# EAGLE board PANS (EAGLE 7.6.0)
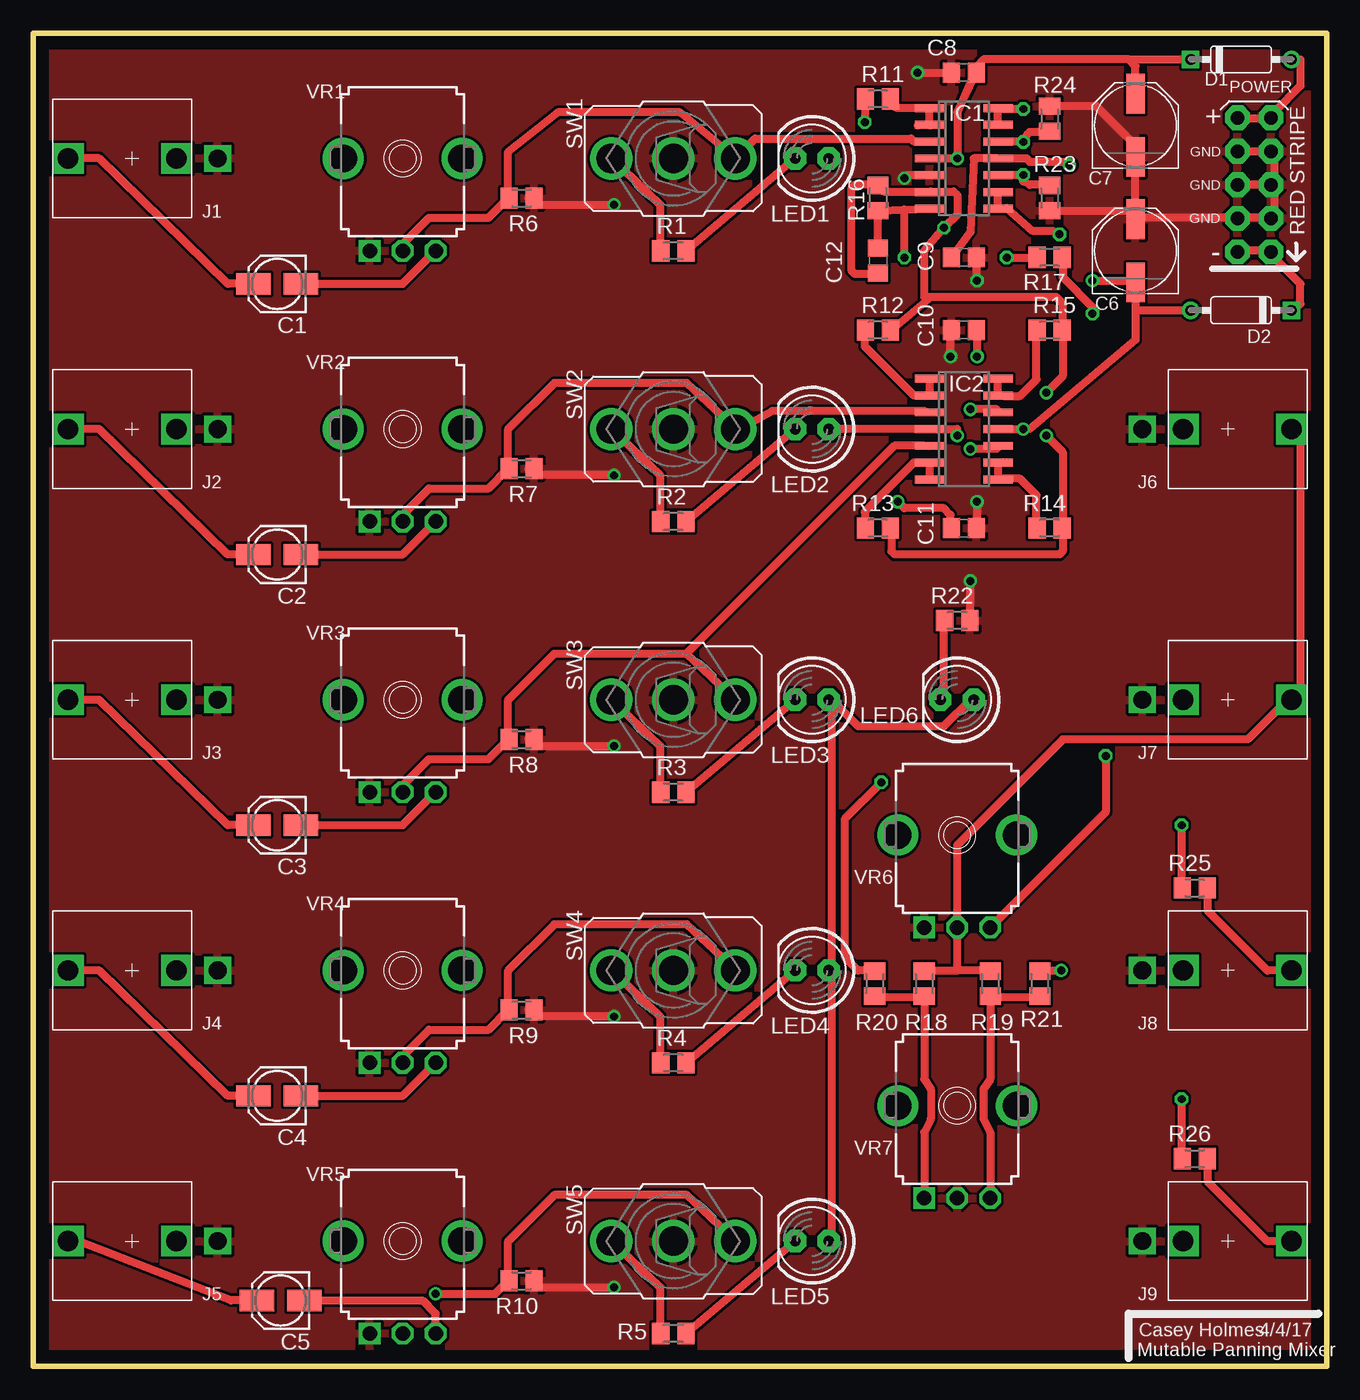
[diagram p0: board, top side]
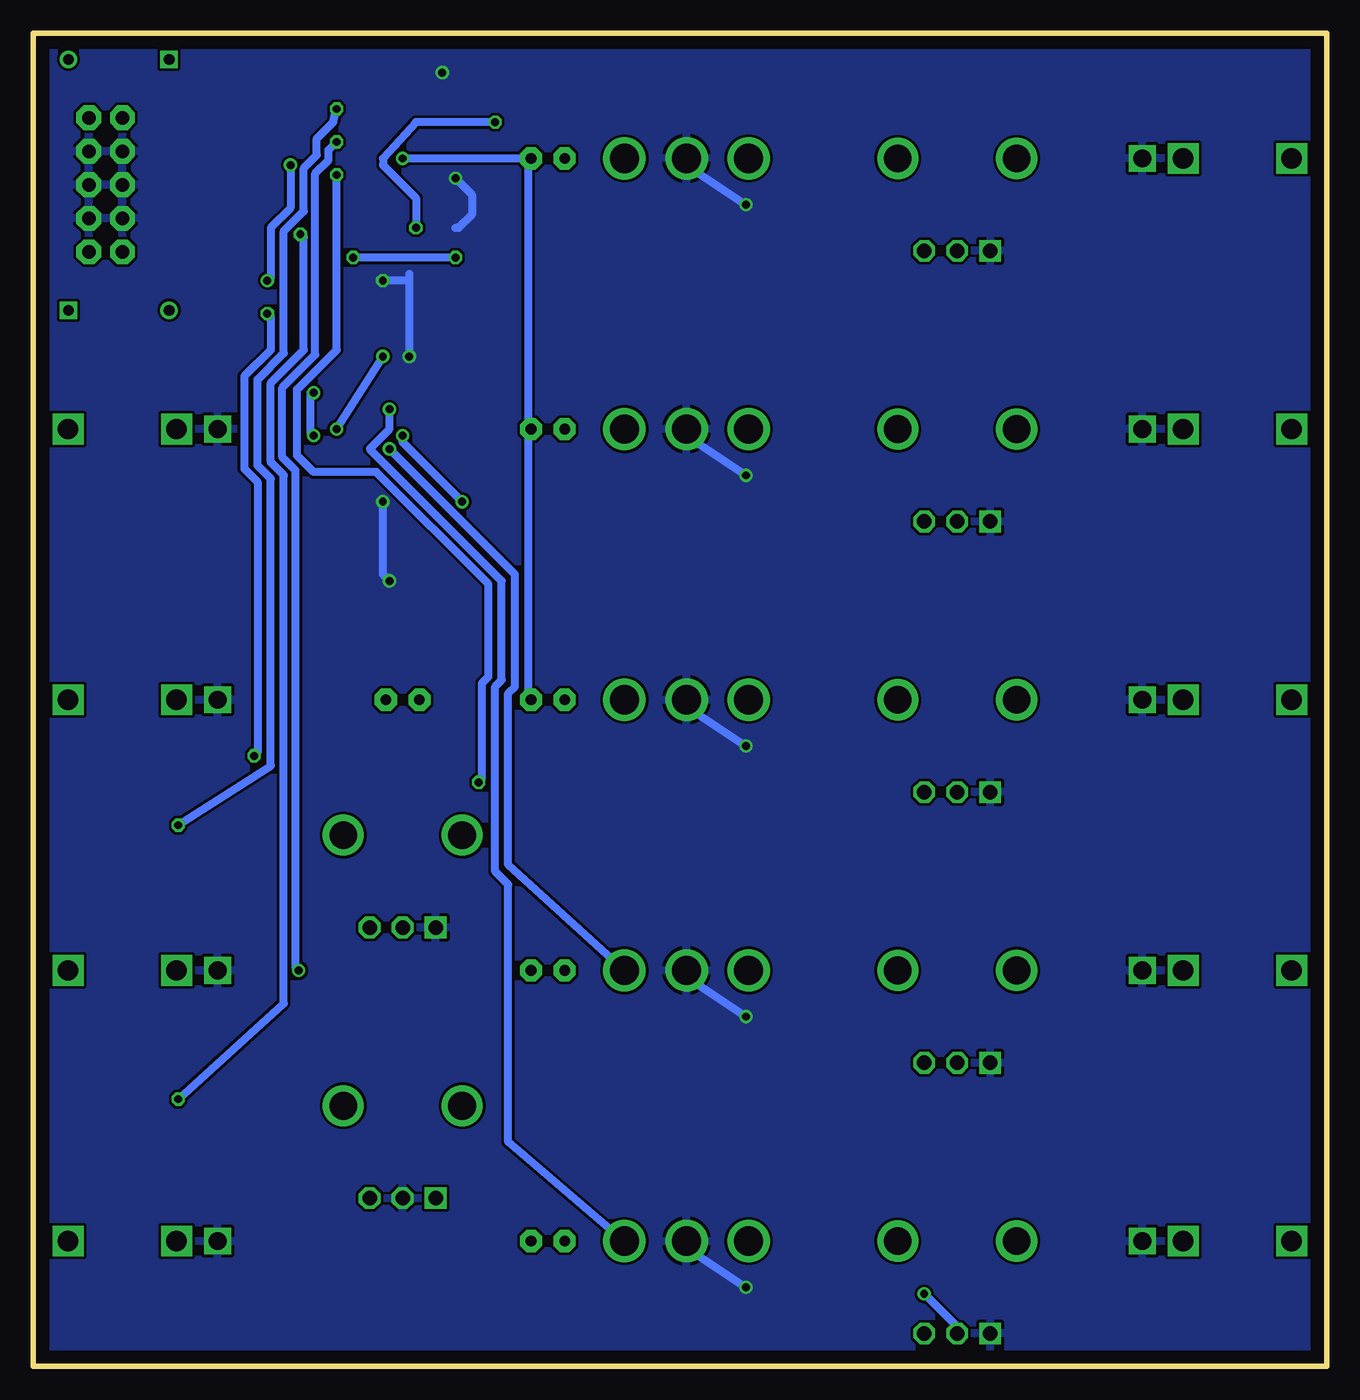
[diagram p1: board, bottom side, seen from below]

Size 98 x 101 mm. Coordinates in mm from the lower left corner, seen from the top.
Outline: 0,0 0,101 98,101 98,0 0,0
Copper layers (1*16): Top 0.035mm / dielectric 1.5mm / Bottom 0.035mm
Design rules "default": minimum track width 10mil, minimum drill 24mil, track to track 8mil, track to pad 8mil, pad to pad 8mil, via to via 8mil, smd to smd 8mil, copper to edge 40mil, drill to drill 8mil, minimum pad ring 10mil, minimum via ring 8mil, stop-mask expansion 4mil, vias tented up to drill 0mil, thermal gap 10mil

## Footprints (pad centres in the part's own frame; a part is rotated, then mirrored left to right if it is on the bottom)
153CLV-0405 = smd 2.6 x 1.6: + 1.8,0; - -1.8,0
PANASONIC_D = smd 3 x 1.4: + 2.4,0; - -2.4,0
C0805 = smd 1.3 x 1.5: 1 -0.95,0; 2 0.95,0
DO35-7 = drill 0.813: A 3.81,0 | drill 0.813 square: C -3.81,0
SO14 = smd 0.6 x 2.2: 1 -3.81,-2.6; 2 -2.54,-2.6; 3 -1.27,-2.6; 4 0,-2.6; 5 1.27,-2.6; 6 2.54,-2.6; 7 3.81,-2.6; 8 3.81,2.6; 9 2.54,2.6; 10 1.27,2.6; 11 0,2.6; 12 -1.27,2.6; 13 -2.54,2.6; 14 -3.81,2.6
THONKICONN = drill 1.35 square: P$1_SLEEVE 0,-6.48 | drill 1.55 square: P$2_SWITCH 0,-3.38; P$3_TIP 0,4.84
LED5MM = drill 0.813 pad 1.676 octagon: A -1.27,0; K 1.27,0
M0805 = smd 1.3 x 1.6: 1 -0.95,0; 2 0.95,0
EURO_PWR_HEADER_FAT = drill 1.016 pad 1.88 octagon: 1 -5.08,-1.27; 2 -5.08,1.27; 3 -2.54,-1.27; 4 -2.54,1.27; 5 0,-1.27; 6 0,1.27; 7 2.54,-1.27; 8 2.54,1.27; 9 5.08,-1.27; 10 5.08,1.27
M9040P = drill 2.2: 1 0,4.699 | drill 2.2 pad 3: 2 0,0; 3 0,-4.699
9MM_SNAP-IN_POT = drill 1.1 square: 1 -2.5,-7 | drill 1.1 octagon: 2 0,-7; 3 2.5,-7 | drill 2.1 pad 2.794: CHASSIS1 -4.5,0; CHASSIS2 4.5,0

## Placement (x,y rotation side)
C1  10uf  [153CLV-0405]  18.5,82 180 top
C2  10uf  [153CLV-0405]  18.5,61.5 180 top
C3  10uf  [153CLV-0405]  18.5,41 180 top
C4  10uf  [153CLV-0405]  18.5,20.5 180 top
C5  10uf  [153CLV-0405]  18.75,5 180 top
C6  47uf  [PANASONIC_D]  83.5,84.5 90 top
C7  47uf  [PANASONIC_D]  83.5,94 90 top
C8  100n  [C0805]  70.5,98 0 top
C9  100n  [C0805]  70.5,84 180 top
C10  100n  [C0805]  70.5,78.5 0 top
C11  100n  [C0805]  70.5,63.5 0 top
C12  XXX  [C0805]  64,83.75 270 top
D1  1N5817  [DO35-7]  91.5,99 0 top
D2  1N5817  [DO35-7]  91.5,80 180 top
IC1  TL074  [SO14]  70.5,91.5 270 top
IC2  TL074  [SO14]  70.5,71 270 top
J1  THONKICONNOLD  [THONKICONN]  7.5,91.5 90 top
J2  THONKICONNOLD  [THONKICONN]  7.5,71 90 top
J3  THONKICONNOLD  [THONKICONN]  7.5,50.5 90 top
J4  THONKICONNOLD  [THONKICONN]  7.5,30 90 top
J5  THONKICONNOLD  [THONKICONN]  7.5,9.5 90 top
J6  THONKICONNOLD  [THONKICONN]  90.5,71 270 top
J7  THONKICONNOLD  [THONKICONN]  90.5,50.5 270 top
J8  THONKICONNOLD  [THONKICONN]  90.5,30 270 top
J9  THONKICONNOLD  [THONKICONN]  90.5,9.5 270 top
LED1  green  [LED5MM]  59,91.5 180 top
LED2  green  [LED5MM]  59,71 180 top
LED3  green  [LED5MM]  59,50.5 180 top
LED4  green  [LED5MM]  59,30 180 top
LED5  green  [LED5MM]  59,9.5 180 top
LED6  green  [LED5MM]  70,50.5 180 top
R1  1K  [M0805]  48.5,84.5 0 top
R2  1K  [M0805]  48.5,64 0 top
R3  1K  [M0805]  48.5,43.5 0 top
R4  1K  [M0805]  48.5,23 0 top
R5  1K  [M0805]  48.5,2.5 0 top
R6  100K  [M0805]  37,88.5 180 top
R7  100K  [M0805]  37,68 180 top
R8  100K  [M0805]  37,47.5 180 top
R9  100K  [M0805]  37,27 180 top
R10  100K  [M0805]  37,6.5 180 top
R11  100K  [M0805]  64,96 0 top
R12  100K  [M0805]  64,78.5 0 top
R13  100K  [M0805]  64,63.5 0 top
R14  100K  [M0805]  77,63.5 0 top
R15  100K  [M0805]  77,78.5 0 top
R16  100K  [M0805]  64,88.5 90 top
R17  1K  [M0805]  77,84 0 top
R18  1K  [M0805]  67.5,29 90 top
R19  1K  [M0805]  72.5,29 90 top
R20  1K  [M0805]  63.75,29 90 top
R21  1K  [M0805]  76.25,29 90 top
R22  100K  [M0805]  70,56.5 0 top
R23  100K  [M0805]  77,88.5 90 top
R24  100K  [M0805]  77,94.5 90 top
R25  1K  [M0805]  88,36.25 180 top
R26  1K  [M0805]  88,15.75 180 top
SV1  SV1  [EURO_PWR_HEADER_FAT]  92.5,89.5 90 top
SW1  on/on  [M9040P]  48.5,91.5 90 top
SW2  on/on  [M9040P]  48.5,71 90 top
SW3  on/on  [M9040P]  48.5,50.5 90 top
SW4  on/on  [M9040P]  48.5,30 90 top
SW5  on/on  [M9040P]  48.5,9.5 90 top
VR1  1M  [9MM_SNAP-IN_POT]  28,91.5 0 top
VR2  1M  [9MM_SNAP-IN_POT]  28,71 0 top
VR3  1M  [9MM_SNAP-IN_POT]  28,50.5 0 top
VR4  1M  [9MM_SNAP-IN_POT]  28,30 0 top
VR5  1M  [9MM_SNAP-IN_POT]  28,9.5 0 top
VR6  10K  [9MM_SNAP-IN_POT]  70,40.25 0 top
VR7  10K  [9MM_SNAP-IN_POT]  70,19.75 0 top

## Library data of the parts
C1-C12 R1-R26 = resistor
D1 D2 IC1 IC2 J1-J9 SV1 SW1-SW5 VR1-VR7 = MusicThingModular
LED1-LED6 = adafruit

## Nets
GND: C6.+ C7.- C8.1 C9.1 C10.1 C11.2 IC1.5 J1.P$1_SLEEVE J2.P$1_SLEEVE J3.P$1_SLEEVE J4.P$1_SLEEVE J5.P$1_SLEEVE J6.P$1_SLEEVE J7.P$1_SLEEVE J8.P$1_SLEEVE J9.P$1_SLEEVE R6.1 R7.1 R8.1 R9.1 R10.1 R22.2 R23.1 R24.2 SV1.3 SV1.4 SV1.5 SV1.6 SV1.7 SV1.8 SW1.2 SW2.2 SW3.2 SW4.2 SW5.2 VR1.1 VR2.1 VR3.1 VR4.1 VR5.1 VR6.1 VR7.2
S$1: C1.+ J1.P$3_TIP
S$2: C2.+ J2.P$3_TIP
S$3: C3.+ J3.P$3_TIP
S$4: C4.+ J4.P$3_TIP
S$5: C5.+ J5.P$3_TIP
S$6: C1.- VR1.3
S$7: C2.- VR2.3
S$8: C3.- VR3.3
S$9: C4.- VR4.3
S$10: C5.- VR5.3
S$11: IC1.3 R6.2 SW1.3 VR1.2
S$12: IC2.3 R7.2 SW2.3 VR2.2
S$13: IC2.5 R8.2 SW3.3 VR3.2
S$14: IC2.10 R9.2 SW4.3 VR4.2
S$15: IC2.12 R10.2 SW5.3 VR5.2
S$16: D1.A SV1.9 SV1.10
S$17: D2.C SV1.1 SV1.2
S$18: LED5.K R5.2
S$19: J6.P$3_TIP J7.P$3_TIP R18.2 R19.2 VR6.2
S$20: R18.1 R20.1 VR7.1
S$21: R19.1 R21.1 VR7.3
S$22: IC1.10 R20.2 R23.2
S$23: IC2.13 IC2.14 R15.1
S$24: IC1.8 IC1.9 R26.2
S$25: LED6.K R22.1
S$26: R1.1 SW1.1
S$27: R2.1 SW2.1
S$28: R3.1 SW3.1
S$29: R4.1 SW4.1
S$30: R5.1 SW5.1
S$31: LED4.K R4.2
S$34: IC1.13 IC1.14 R25.2
S$35: J8.P$3_TIP R25.1
S$36: IC1.12 R21.2 R24.1
S$37: LED3.K R3.2
S$38: LED2.K R2.2
S$39: LED1.K R1.2
S$41: J9.P$3_TIP R26.1
S$42: IC2.1 IC2.2 R12.1
S$43: IC2.6 IC2.7 R13.1
S$45: IC2.8 IC2.9 R14.1
S$46: IC1.1 IC1.2 R11.2
S$47: R17.2 VR6.3
S$48: C6.- C9.2 C10.2 D2.A IC1.11 IC2.11
S$50: C12.2 IC1.6 R11.1 R12.2 R13.2 R14.2 R15.2 R16.2
S$51: C12.1 IC1.7 R16.1 R17.1
V+: C7.+ C8.2 C11.1 D1.C IC1.4 IC2.4 LED1.A LED2.A LED3.A LED4.A LED5.A LED6.A

## Tracks (layer width: path | path; a pad name or v marks a point on that pad's centre or on a via)
GND  (via drill 0.6)
  Top 0.61: 38,68 R7.1 37.5,68 38,67.5 v44,67.5 | 38,47.5 R8.1 37.5,47.5 38,47 v44,47 | 38,27 R9.1 37.5,27 38,26.5 v44,26.5 | v44,88 38,88 37.5,88.5 R6.1 | 38,6.5 R10.1 37.5,6.5 38,6 v44,6 | v67,98 C8.1 | SV1.8 91.5,92 93.5,92 SV1.7 94,92 94,89.5 | SV1.6 SV1.5 94,89.5 | 94,89.5 94,87 SV1.3 93.5,87 91.5,87 SV1.4 91,87 83.5,87 | R24.2 77,95.5 80.5,95.5 83.5,92.5 C7.- 83.5,87 | 83.5,87 C6.+ 83.25,87.5 77,87.5 R23.1 | C9.1 71.5,84 v71.5,82.25 | C10.1 69.5,78.5 v69.5,76.5 | C11.2 71.5,63.5 v71.5,65.5 | v71,59.5 71,56.5 R22.2 | v66,90 66.25,90.25 67.75,90.25 IC1.5
  Bottom 0.61: v44,26.5 48.5,29.5 SW4.2 | v44,47 48.5,50 SW3.2 | v44,67.5 48.5,70.5 SW2.2 | v44,88 48.5,91 SW1.2 | v44,6 48.5,9 SW5.2 | 69.5,82.25 v71.5,82.25 | 69.5,82.25 v69.5,76.5 | v71.5,65.5 71.5,60 v71,59.5 | 66,86.25 65.75,86.25 64.75,87.25 64.75,88.75 v66,90 | 69.5,82.75 69.5,82.25
  pour Bottom: 0.12,0 0.12,100.88 98.12,100.88 98.12,-0.12 0.12,-0.12
  pour Top: 0,0 0,101 98,101 98,0
S$1
  Top 0.61: J1.P$3_TIP 5,91.5 14.75,82 C1.+
S$2
  Top 0.61: J2.P$3_TIP 5,71 14.75,61.5 C2.+
S$3
  Top 0.61: J3.P$3_TIP 5,50.5 14.75,41 C3.+
S$4
  Top 0.61: J4.P$3_TIP 5,30 14.75,20.5 C4.+
S$5
  Top 0.61: J5.P$3_TIP 3.5,9.5 15,5 C5.+
S$6
  Top 0.61: C1.- 28,82 VR1.3
S$7
  Top 0.61: C2.- 28,61.5 VR2.3
S$8
  Top 0.61: C3.- 28,41 VR3.3
S$9
  Top 0.61: C4.- 28,20.5 VR4.3
S$10
  Top 0.61: C5.- 29.5,5 30.5,4 VR5.3
S$11
  Top 0.61: 36,88.5 34.5,87 30,87 28,85 VR1.2 | 36,88.5 36,92 39.75,95 49,95 53.25,91.5 SW1.3 54.7,93 66.5,93 66.73,92.77 IC1.3 | 36,88.5 R6.2
S$12
  Top 0.61: 36,68 34.5,66.5 30,66.5 28,64.5 VR2.2 | 36,68 36,71 39.5,74.5 49.5,74.5 53.25,71 | 36,68 R7.2 | 53.25,71 53.5,71 56,72.38 67.5,72.38 IC2.3 | 53.25,71 SW2.3
S$13
  Top 0.61: 36,47.5 34.5,46 30,46 28,44 VR3.2 | 49.5,54 53.25,50.5 SW3.3 | 49.5,54 39.5,54 36,50.5 36,47.5 | 36,47.5 R8.2 | 49.5,54 65.25,69.75 67.5,69.75 IC2.5
S$14  (via drill 0.6)
  Top 0.61: 36,27 34.5,25.5 30,25.5 28,23.5 VR4.2 | 36,27 36,30 39.5,33.5 49.5,33.5 53.25,30 SW4.3 | 36,27 R9.2 | v71,69.5 73,69.5 IC2.10
  Bottom 0.61: v71,69.5 61.5,60 61.5,51.5 62,51 62,38 53.25,30 SW4.3
S$15  (via drill 0.6)
  Top 0.61: 36,6.5 35,5.5 v30.5,5.5 | 36,6.5 36,9.5 39.5,13 49.5,13 53.25,9.5 SW5.3 | 36,6.5 R10.2 | v71,72.5 73,72.5 IC2.12
  Bottom 0.61: v30.5,5.5 28,3 VR5.2 | v71,72.5 71,71 72.5,69.5 62.5,59.5 62.5,52 63,51.5 63,37.5 62,36.5 62,17 53.25,9.5 SW5.3
S$16
  Top 0.61: SV1.10 91.5,94.5 93.5,94.5 SV1.9 94,95 96,97 96,99 D1.A
S$17
  Top 0.61: D2.C 95.5,80 96,80.5 96,82 94,84 SV1.1 93.5,84.5 91.5,84.5 SV1.2
S$18
  Top 0.61: LED5.K 57.75,9.5 49.5,2.5 R5.2
S$19
  Top 0.61: 70,30 VR6.2 70,39.5 78,47.5 92,47.5 95,50.5 J7.P$3_TIP 95.5,50.5 96,51 96,70.5 95.5,71 J6.P$3_TIP | 70,30 67.5,30 R18.2 | 70,30 72.5,30 R19.2
S$20
  Top 0.61: R18.1 67.5,21.75 68,21 68,18.75 67.5,17.75 VR7.1 | 67.25,28 R18.1 | R18.1 67,28 63.75,28 R20.1
S$21
  Top 0.61: VR7.3 72.5,17.75 72,18.75 72,21 72.5,21.75 R19.1 | 72.75,28 R19.1 | R21.1 76.25,28 73,28 R19.1
S$22  (via drill 0.6)
  Top 0.61: v64.25,44.25 61.5,41.5 61.5,31 62.5,30 63.75,30 R20.2 | IC1.10 73.25,90.25 v75,90.25 75,89.75 75.5,89.5 77,89.5 R23.2
  Bottom 0.61: v75,90.25 75,77 78,74 78,69 76.75,67.75 72,67.75 63.5,59.25 63.5,52.25 64,51.75 64,44.5 v64.25,44.25
S$23
  Top 0.61: 76,78.5 R15.1 76,78.25 76,74.75 74.75,73.5 73.5,73.5 IC2.13 IC2.14
S$24  (via drill 0.6)
  Top 0.61: v77.75,85.75 77.25,86 75.75,86 73.75,87.75 73.25,87.75 IC1.8 IC1.9 | v87,20.25 87,15.75 R26.2
  Bottom 0.61: v77.75,85.75 77.5,85.5 77.5,77 80,74.5 80,68.5 79,67.5 79,27.5 v87,20.25
S$25
  Top 0.61: R22.1 69,56.5 69,50.5 LED6.K
S$26
  Top 0.61: R1.1 47.5,84.5 47.5,88 SW1.1
S$27
  Top 0.61: R2.1 47.5,64 47.5,67.5 SW2.1
S$28
  Top 0.61: R3.1 47.5,43.5 47.5,47 SW3.1
S$29
  Top 0.61: R4.1 47.5,23 47.5,26.5 SW4.1
S$30
  Top 0.61: R5.1 47.5,2.5 47.5,6 SW5.1
S$31
  Top 0.61: LED4.K 57.75,30 49.5,23 R4.2
S$34  (via drill 0.6)
  Top 0.61: v87,41 87,36.25 R25.2 | v75,95.25 73.25,95.25 IC1.14 IC1.13
  Bottom 0.61: v75,95.25 75.25,94.25 76.5,93 76.5,91.75 77.5,90.75 77.5,87.5 79,86 79,76.75 81,74.75 81,68.25 80,67.25 80,45.5 v87,41
S$35
  Top 0.61: J8.P$3_TIP 93.5,30 89,34.5 89,36.25 R25.1
S$36  (via drill 0.6)
  Top 0.61: 76.25,30 R21.2 76.5,30 v77.88,30 | R24.1 77,93.5 75.5,93.5 75.25,93.25 v75,92.75 73.25,92.75 IC1.12
  Bottom 0.61: v75,92.75 75.62,92.12 75.62,91.38 76.62,90.38 76.62,76.62 79.12,74.12 79.12,68.88 78.12,67.88 78.12,30.25 v77.88,30
S$37
  Top 0.61: LED3.K 57.75,50.5 49.5,43.5 R3.2
S$38
  Top 0.61: LED2.K 57.75,71 49.5,64 R2.2
S$39
  Top 0.61: LED1.K 57.75,91.5 49.5,84.5 R1.2
S$41
  Top 0.61: J9.P$3_TIP 93.5,9.5 89,14 89,15.75 R26.1
S$42
  Top 0.61: 63,78.5 R12.1 63,78.45 63,77.25 66.71,73.54 IC2.2 | IC2.1 IC2.2 | 67.5,73.5 IC2.2
S$43
  Top 0.61: R13.1 63,63.5 63,64.75 66.75,68.5 67.5,68.5 IC2.6 IC2.7
S$45
  Top 0.61: 73.5,68.5 IC2.9 | IC2.9 IC2.8 | IC2.8 73.25,67.25 | 73.75,68.5 IC2.9 | 76,63.5 R14.1 | 76,63.25 R14.1 | IC2.8 73.5,67.25 74.75,67.25 76,66 76,63.75 R14.1
S$46
  Top 0.61: 67.94,94 67,94 | 67.94,94 IC1.2 IC1.1 65.64,95.31 arc-90 R11.2 65,96 | 67.94,94 68,94
S$47  (via drill 0.6)
  Top 0.61: VR6.3 81.25,42 v81.25,46.25 | v80.25,79.75 80.25,80.25 78,82.5 78,84 R17.2
  Bottom 0.61: v81.25,46.25 81,46.5 81,67 82,68 82,75 80,77 80,79.5 v80.25,79.75
S$48  (via drill 0.6)
  Top 0.61: C9.2 71,85.95 71.25,91.5 IC1.11 75.25,91.5 75.5,91.25 78.25,91.25 v78.5,91 | IC2.11 v75,71 75.5,71 83.5,77.75 83.5,80 | v71.5,76.5 71.5,78.5 C10.2 | 83.5,80 C6.- 83.25,82.25 v80.25,82.25 | 83.5,80 D2.A
  Bottom 0.61: v75,71 v71.5,76.5 | v80.25,82.25 80,82.5 80,86.25 78.5,87.75 v78.5,91
S$50  (via drill 0.6)
  Top 0.61: 65,63.5 R13.2 | 65,63.25 R13.2 | 78,63.5 R14.2 | 78,63.75 R14.2 | R16.2 64.49,88.96 IC1.6 68,89 69.75,89 70,88.75 70,87.25 v69,86.25 67.5,84.5 67.5,81 68,81 | 64,89.5 R16.2 | 68,81 65,78.5 R12.2 | 68,81 77.5,81 78,80.5 78,78.5 | v76.75,73.75 78,75 78,78.5 | 78,78.5 R15.2 | v63,94.25 63,96 R11.1 | R13.2 65,63 65,61.75 65.25,61.5 77.75,61.5 78,61.75 78,63.25 R14.2 | v76.75,70.5 78,69.25 78,64 R14.2 | R16.2 63.75,89.5 62.25,89.5 62,89.25 62,83 62.25,82.75 64,82.75 C12.2
  Bottom 0.61: v69,86.25 69,88.5 71.5,91 71.5,91.5 69,94.25 v63,94.25 | v76.75,70.5 77,70.75 77,73.75 v76.75,73.75
S$51  (via drill 0.6)
  Top 0.61: 66,87.62 R16.1 C12.1 | 66,87.62 IC1.7 | v73.75,84 R17.1 | v66,84 66,87.62
  Bottom 0.61: v66,84 v73.75,84
V+  (via drill 0.6)
  Top 0.61: 61,50 60.5,50.5 LED3.A | 61,50 62.5,48.5 69,48.5 71,50.5 LED6.A | 61,50 60.5,49.5 60.5,30 | 60.5,30 60.5,9.5 LED5.A | 60.5,30 LED4.A | 70,95 71.5,98.5 72,99 83,99 | 83,99 83.5,98.5 C7.+ | 70,95 C8.2 | 83,99 D1.C | 70,95 v70,91.5 IC1.4 | LED2.A IC2.4 70,71 v70,70.5 | v65.5,65.5 66,65 69,65 69.5,64.5 69.5,63.5 C11.1
  Bottom 0.61: 60.5,91.5 60.5,71 | 60.5,71 60.5,50.5 LED3.A | 60.5,71 LED2.A | v70,91.5 60.5,91.5 | 60.5,91.5 LED1.A | v70,70.5 70,70 v65.5,65.5

## Text on the board
tNames: Casey Holmes | 4/4/17 | Mutable Panning Mixer